# Altium PCB Driver Morpheus PONTE H.PcbDoc
Units mm, origin at the board's own origin, x right, y up, seen from the top; angles counter-clockwise.
Board outline 48.9 x 49 mm, 2 copper layers (Top Layer, Bottom Layer); 55 components, 25 nets, 160 pads, 24 vias.
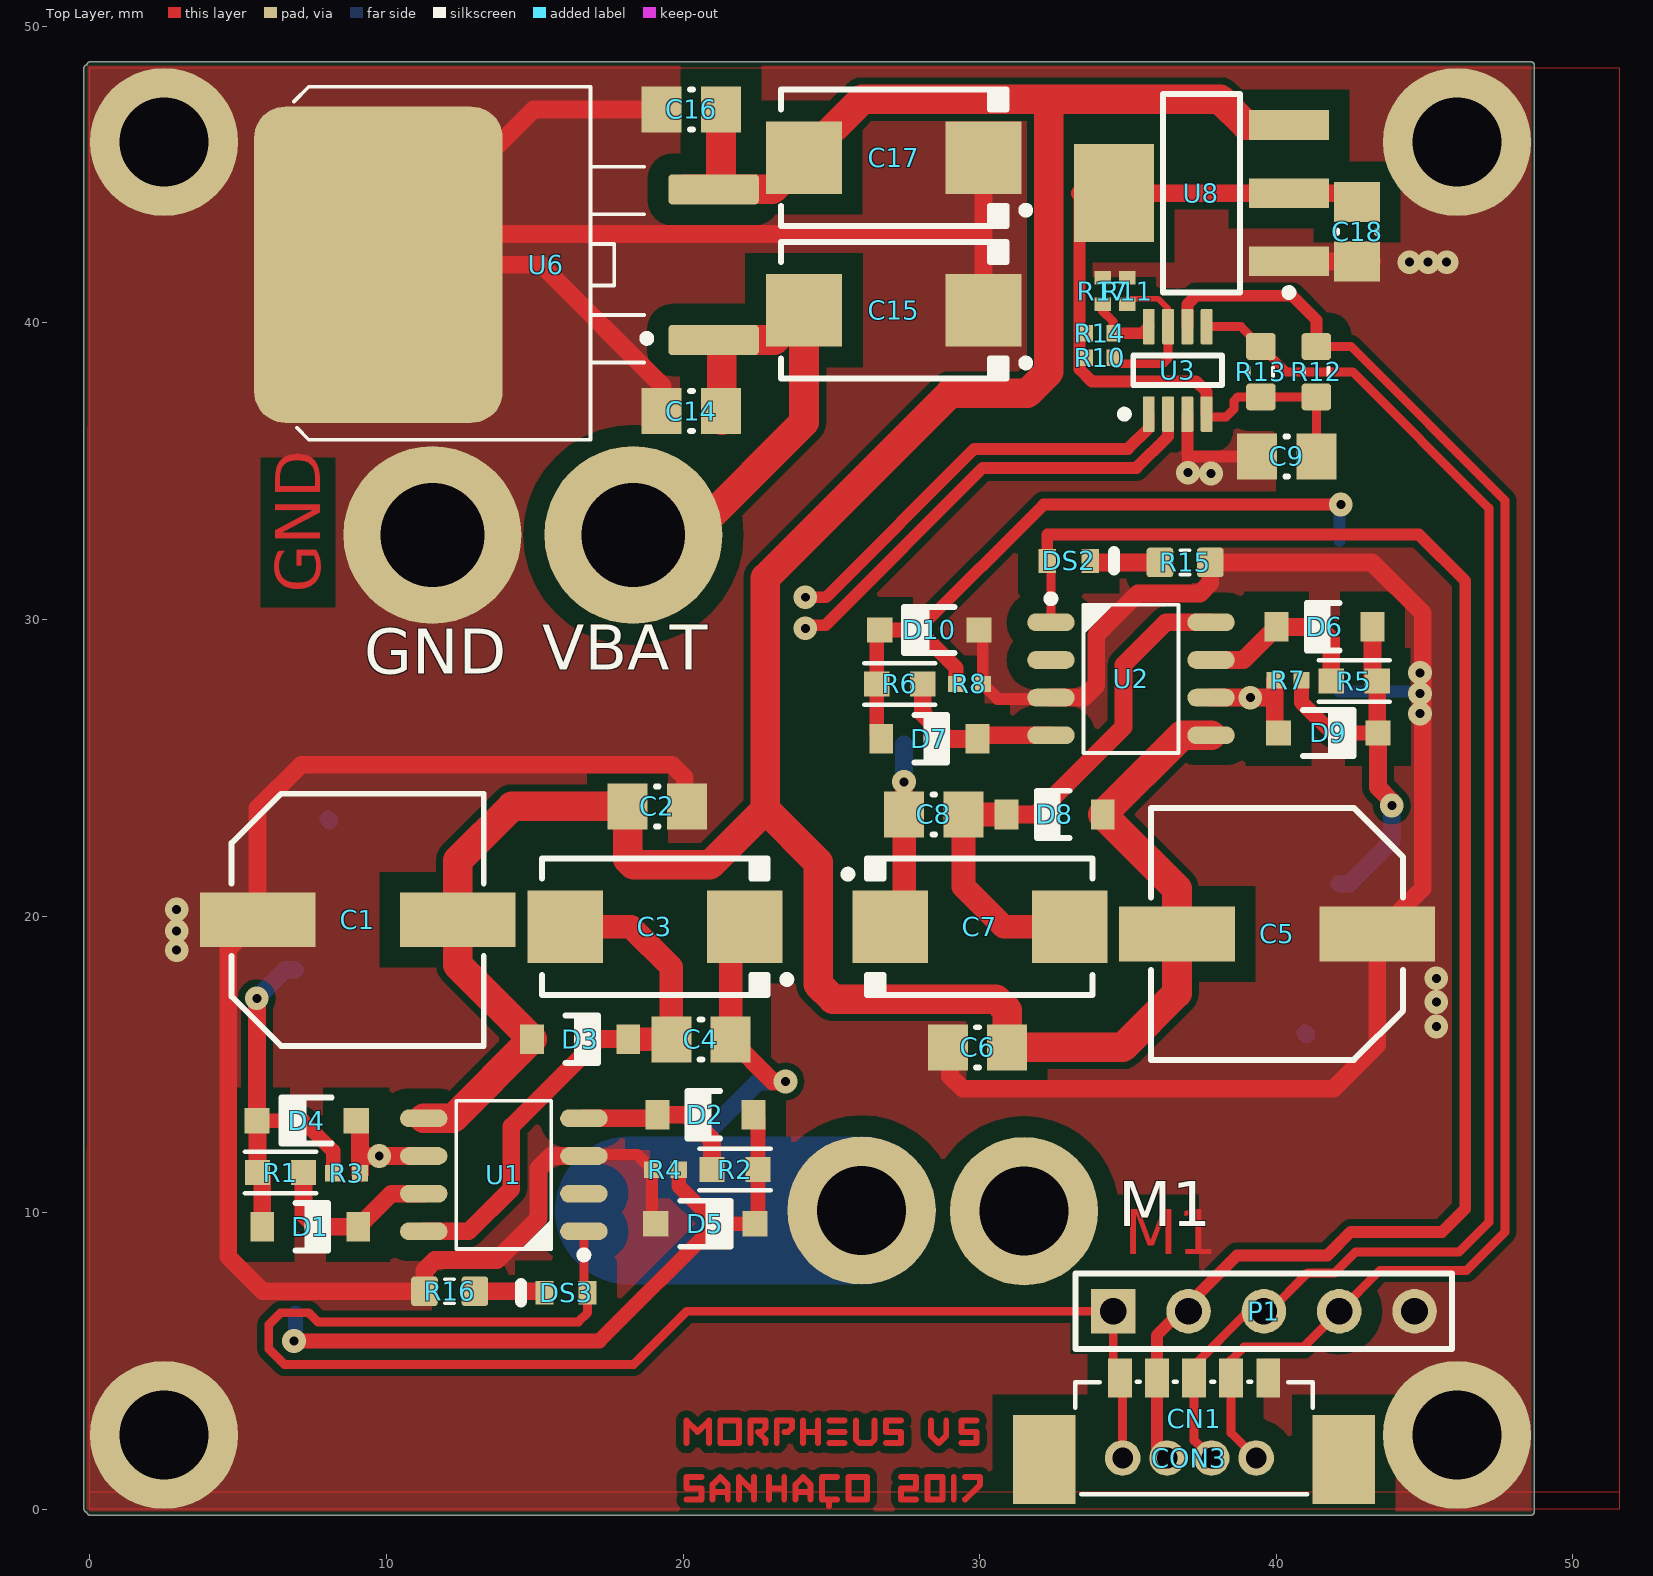
[diagram p0: Top Layer view]
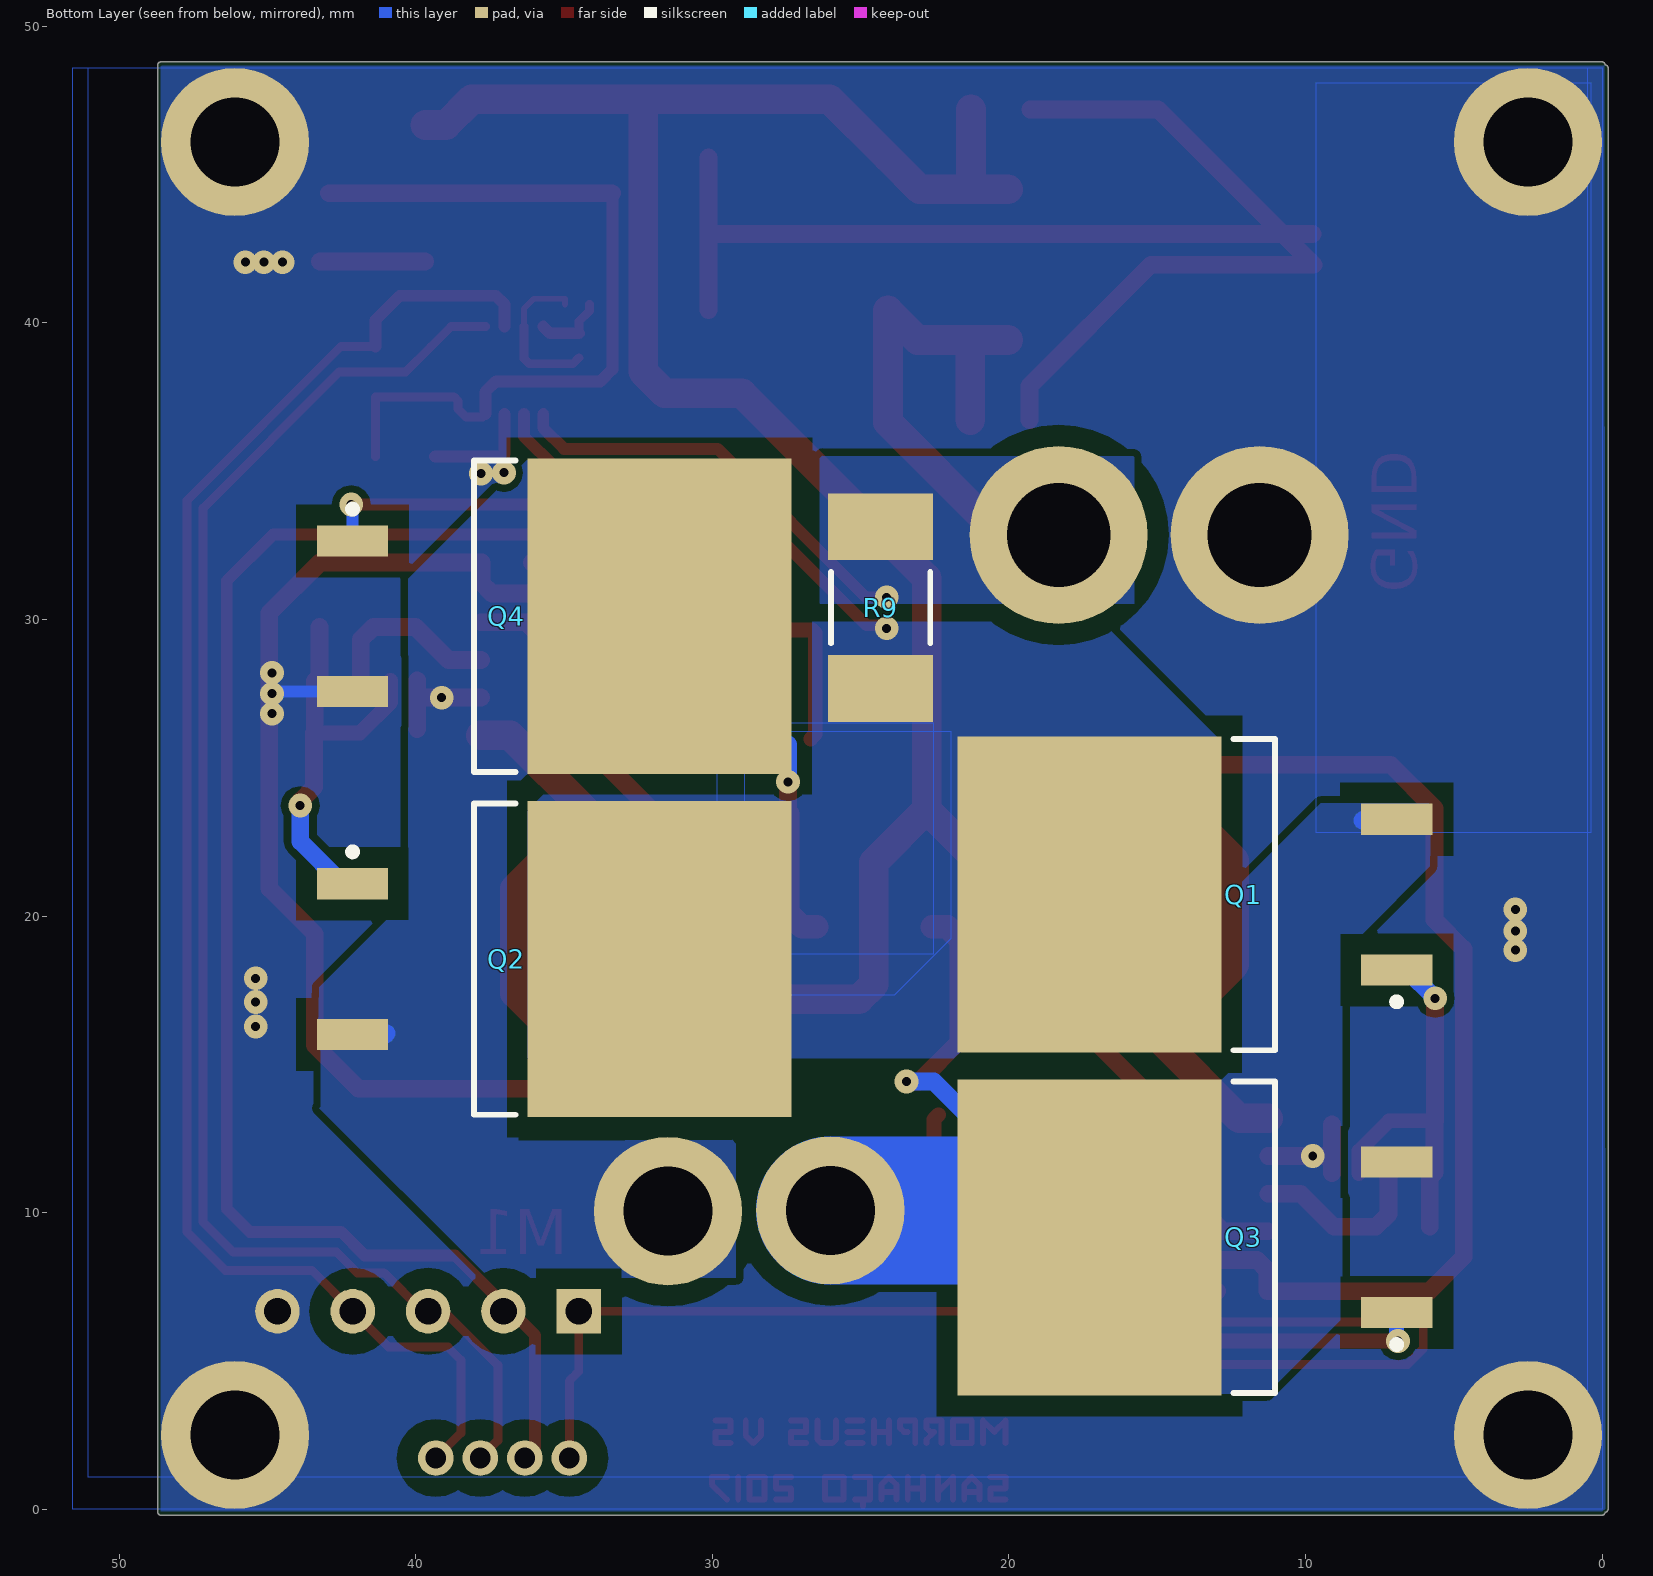
[diagram p1: Bottom Layer view, seen from below]

## Layer stack, top to bottom
Top Solder: solder mask 0.0102, Solder Resist, Dk 3.5
Top Layer: signal copper 0.0356
Dielectric 1: dielectric 0.32, FR-4, Dk 4.8
Bottom Layer: signal copper 0.0356
Bottom Solder: solder mask 0.0102, Solder Resist, Dk 3.5

## Board outline
-0.1,-0.1 cw(c-0.1,0) -0.2,0 -0.2,48.6 cw(c-0.1,48.6) -0.1,48.7 cw(c0,48.7) 0,48.8 48.6,48.8 cw(c48.6,48.7) 48.7,48.7 48.7,-0.1 cw(c48.6,-0.1) 48.6,-0.2 0,-0.2 cw(c0,-0.1)

## Design rules (kind name [scope] priority, off if disabled: settings)
BoardOutlineClearance [All] p1: gap=0 ignorepadtopadclearanceinfootprint=FALSE
Clearance Clearance_1 [IsPad vs InPolygon] p1: gap=0.7 ignorepadtopadclearanceinfootprint=FALSE
Clearance [All] p2: gap=0.24 ignorepadtopadclearanceinfootprint=FALSE except(0: Arc-Hole Track-Hole SMDPad-Hole THPad-Hole Via-Hole Fill-Hole Poly-Hole Region-Hole Text-Hole; 0.7: Track-Region)
ComponentClearance [All vs InComponentClass('IGNORA')] p1: gap=-1 collisioncheckmode=3 verticalgap=-1 showdistances=FALSE
ComponentClearance ComponentClearance_1 [All] p2: gap=0.254 collisioncheckmode=3 verticalgap=0.254 showdistances=FALSE
PlaneConnect [All] p1: planeconnectstyle=Direct reliefexpansion=0.508 reliefentries=4 reliefconductorwidth=0.254 reliefairgap=0.254
PolygonConnect [All] p1: connectstyle=Direct reliefconductorwidth=0.254 reliefentries=4 polygonreliefangle="90 Angle" airgapwidth=0.254
RoutingVias [All] p1: holewidth=0.3 width=0.4 viastyle="Through Hole" minholewidth=0.3 minwidth=0.4 maxholewidth=0.4 maxwidth=0.6
SMDNeckDown [InNet('No Net')] p1: percent=70.000
SolderMaskExpansion [All] p1: expansion=0.102
Width [All] p1: maxlimit=15 minlimit=0.01 preferedwidth=0.4
28 further rules are at their usual default settings.

## Classes and differential pairs
component class "Driver Morpheus SENSOR CORRENTE": C9 R10 R11 R12 R13 R14 R17 U3
component class "Driver Morpheus PONTE H": C1 C2 C3 C4 C5 C6 C7 C8 C14 C15 C16 C17 C18 CN1 CON3 D1 D2 D3 D4 D5 D6 D7 D8 D9 D10 DS2 DS3 P1 Q1 Q2 Q3 Q4 R1 R2 R3 R4 R5 R6 R7 R8 R9 R15 R16 U1 U2 U6 U8

## Components (designator, comment, footprint, x,y, rotation, side; value= is the part's Value field where it differs from the comment)
C1 "100uF 25v" CAPAE9083X70M 9.031,19.875 r0 top
C2 "CAP 100nF 25V 0805(2012)" CAPC0805(2012)145_M#1 19.131,23.7 r180 top value=100nF
C3 "Cap_10u_35v" "CAP POL 2917/7343" 19.051,19.637 r180 top
C4 "CAP 100nF 25V 0805(2012)" CAPC0805(2012)145_M#2 196.247,-58.197 r180 top value=100nF
C5 "100uF 25v" CAPAE9083X70M 40.031,19.4 r180 top
C6 "CAP 100nF 25V 0805(2012)" CAPC0805(2012)145_M#1 29.931,15.575 r0 top value=100nF
C7 "Cap_10u_35v" "CAP POL 2917/7343" 30.011,19.638 r0 top
C8 "CAP 100nF 25V 0805(2012)" CAPC0805(2012)145_M#2 -147.185,97.472 r0 top value=100nF
C9 "CAP 100nF 25V 0805(2012)" CAPC0805(2012)145_M#1 40.356,35.5 r0 top value=100nF
C14 "CAP 100nF 25V 0805(2012)" CAPC0805(2012)145_M#1 20.281,37.025 r0 top value=100nF
C15 "Cap_10u_35v" "CAP POL 2917/7343" 27.106,40.425 r180 top
C16 "CAP 100nF 25V 0805(2012)" CAPC0805(2012)145_M#1 20.281,47.2 r0 top value=100nF
C17 "Cap_10u_35v" "CAP POL 2917/7343" 27.106,45.575 r180 top
C18 "CAP 100nF 25V 0805(2012)" CAPC0805(2012)145_M#1 42.731,43.075 r90 top value=100nF
CN1 "53398-0571" 53398-05 37.231,3.175 r0 top
CON3 "B4B-ZR" B4B-ZR 34.825,1.725 r0 top
D1 "1N4148W" JSCJ-SOD-123-2_V 7.431,9.525 r0 top
D2 "1N4148W" JSCJ-SOD-123-2_V 20.756,13.3 r180 top
D3 "1N4148W" JSCJ-SOD-123-2_V 16.531,15.85 r0 top
D4 "MMSZ5246B-E3-08" VISH-SOD-123-2_V 7.306,13.1 r180 top
D5 "MMSZ5246B-E3-08" VISH-SOD-123-2_V 20.756,9.625 r0 top
D6 "1N4148W" JSCJ-SOD-123-2_V 41.631,29.75 r180 top
D7 "1N4148W" JSCJ-SOD-123-2_V 28.306,25.975 r0 top
D8 "1N4148W" JSCJ-SOD-123-2_V 32.531,23.425 r180 top
D9 "MMSZ5246B-E3-08" VISH-SOD-123-2_V 41.756,26.175 r0 top
D10 "MMSZ5246B-E3-08" VISH-SOD-123-2_V 28.306,29.65 r180 top
DS2 "TLMB1100-GS08" VISH-TLMX1100-2_V 33.006,31.975 r0 top
DS3 "TLMB1100-GS08" VISH-TLMX1100-2_V 16.056,7.3 r180 top
P1 "Header 5" HDR1X5 34.506,6.675 r0 top
Q1 "IRF3205S" D2PAK_N 13.728,20.725 r0 bottom
Q2 "IRF3205S" D2PAK_N 35.334,18.55 r180 bottom
Q3 "IRF3205S" D2PAK_N 13.728,9.167 r0 bottom
Q4 "IRF3205S" D2PAK_N 35.334,30.108 r180 bottom
R1 "22" SMD-0603-RES 6.431,11.35 r270 top
R2 "22" SMD-0603-RES 21.756,11.45 r90 top
R3 "RC0402JR-071KL" RES-0402 8.656,11.325 r180 top value=1K
R4 "RC0402JR-071KL" RES-0402 19.406,11.45 r0 top value=1K
R5 "22" SMD-0603-RES 42.631,27.925 r270 top
R6 "22" SMD-0603-RES 27.306,27.825 r90 top
R7 "RC0402JR-071KL" RES-0402 40.406,27.95 r0 top value=1K
R8 "RC0402JR-071KL" RES-0402 29.656,27.825 r180 top value=1K
R9 "KRL9045-C-R008-F-T1" RESC6332X09M 24.331,30.4 r270 bottom
R10 "10K" 0402-RES-HD 34.05,38.825 r180 top
R11 "10K" 0402-RES-HD 34.975,41.075 r270 top
R12 "Thick Film" RESC1608X55N 41.356,38.354 r90 top value=10K
R13 "Thick Film" RESC1608X55N 39.486,38.354 r90 top value=10K
R14 "10K" 0402-RES-HD 34.05,39.65 r180 top
R15 "Thick Film" RESC1608X55N 36.931,31.925 r0 top value=220R
R16 "Thick Film" RESC1608X55N 12.131,7.35 r180 top value=220R
R17 "10K" 0402-RES-HD 34.15,41.075 r270 top
U1 "IR2184" SOIC127P600X175-8AN 13.956,11.275 r180 top
U2 "IR2184" SOIC127P600X175-8AN 35.106,28 r0 top
U3 "INA219AIDCNR" DCN0008A_M 36.681,38.4 r90 top
U6 "L7812" D2PAK-3 15.381,41.963 r0 top
U8 "LD1117AS33TR" SOT-223_M 37.481,44.375 r180 top

## Footprints (in the part's own frame and the unit in brackets; to place one, negate y for a bottom-side part, rotate by r counter-clockwise, add the part's x,y. Pads: shape width x height; smd on the part's side, far side on the other; paste and mask are expansions set on the pad)
0402-RES-HD [mm] "Chip Resistor, Body 1.0x0.5mm, IPC High Density"
  rect 0.45x0.55 smd: 1(-0.45,0) 2(0.45,0)
  body extent -0.52,-0.27 0.53,0.28, height 0.4
53398-05 [mm]
  rect 0.8x1.3 smd: 1(-2.5,1.25) 2(-1.25,1.25) 3(0,1.25) 4(1.25,1.25) 5(2.5,1.25)
  rect 2.1x3 smd: PAD1(-5.05,-1.5) PAD2(5.05,-1.5)
  silkscreen extent -4,-2.67 4,1.12, body extent -5.7,-2.61 5.7,1.59, height 4.7
B4B-ZR [mm]
  round 1.2 hole 0.7: 1(0,0) 2(1.5,0) 3(3,0) 4(4.5,0)
  body extent -1.5,-1.3 6,2.2, height 4.5
"CAP POL 2917/7343" [mm] "Molded Capacitor, 2-Leads, Body 7.30x4.30mm, IPC Medium Density"
  rect 2.55x2.45 smd: 1(-3.025,0) 2(3.025,0)
  silkscreen extent -4.58,-2.3 3.8,2.3, body extent -3.65,-2.15 3.65,2.15, height 4.1
CAPAE9083X70M [mm] "Aluminum Electrolytic Capacitor, Body 8,30x8,30x7,00mm, IPC Low Density"
  rect 3.9x1.85 smd: 1(-3.375,0) 2(3.375,0)
  silkscreen extent -4.25,-4.25 4.25,4.25, body extent -4.25,-4.25 4.25,4.25, height 7
CAPC0805(2012)145_M#1 [mm] "Chip Capacitor, Body 2.0x1.2mm, Height 1.45mm, IPC Low Density"
  rect 1.35x1.55 smd: 1(-1,0) 2(1,0)
  silkscreen extent -0.05,-0.67 0.05,0.67, body extent -1.1,-0.72 1.1,0.72, height 1.45
CAPC0805(2012)145_M#2 [mm] "Chip Capacitor, Body 2.0x1.2mm, Height 1.45mm, IPC Low Density"
  rect 1.35x1.55 smd: 1(174.641,-74.041) 2(176.641,-74.041)
  silkscreen extent 175.59,-74.72 175.69,-73.37, body extent 174.54,-74.77 176.74,-73.32, height 1.45
D2PAK-3 [mil] "D-PAK/TO-263-3; 3 Leads (1 Cropped); Body 14.7 (inc. leads) x 10.2 mm (LxW max)"
  round 20 on Mech15: 0(0,0)
  rrect25% 120x40 smd: 1(222.5,-100) 3(222.5,100)
  rrect25% 330x420 smd: 2(-222.5,0)
  silkscreen extent -335,-232 139,236, body extent -361,-197 256,197, height 189
D2PAK_N [mm] "D-PAK/TO-263-3; 3 Leads (1 Cropped); Body 14.7 (inc. leads) x 10.2 mm (LxW max)"
  rect 2.4x1.05 smd: 1(-6.8,2.54) 3(-6.8,-2.54)
  rect 8.9x10.65 smd: 2(3.55,0)
  silkscreen extent -6.92,-5.25 -1.3,5.25, body extent -2.7,-5.28 6.3,5.28, height 4.69
DCN0008A_M [mm] "SOT23, 8-Leads, Body 3x1.75mm, Pitch 0.65mm, IPC Low Density"
  rrect22% 1.2x0.4 smd: 1(-1.475,0.975) 2(-1.475,0.325) 3(-1.475,-0.325) 4(-1.475,-0.975) 5(1.475,-0.975) 6(1.475,-0.325) 7(1.475,0.325) 8(1.475,0.975)
  silkscreen extent -1.6,-1.5 0.5,1.92, body extent -0.88,-1.5 0.87,1.5, height 1.45
HDR1X5 [mm] "Connector; Header; 5 Position"
  rect 1.5x1.5 hole 0.9: 1(0,0)
  round 1.5 hole 0.9: 2(2.54,0) 3(5.08,0) 4(7.62,0) 5(10.16,0)
  silkscreen extent -1.27,-1.27 11.43,1.27
JSCJ-SOD-123-2_V [mm] "SMD, 2-Leads, Body 2.7x1.6mm, Height 1.25mm"
  rect 0.8x1 smd: 1(-1.62,0) 2(1.62,0)
  silkscreen extent -0.5,-0.8 0.6,0.8, body extent -1.35,-0.8 1.35,0.8, height 1.25
RES-0402 [mm]
  rect 0.55x0.55 smd: 1(-0.45,0) 2(0.45,0)
  body extent -0.53,-0.27 0.53,0.28, height 0.4
RESC1608X55N [mm] "Chip Resistor, Body 1.6x0.8mm, EIA 0603, IPC Medium Density"
  round 0.254 on Mech15: 0(0,0)
  rrect25% 0.9x1 smd: 1(-0.85,0) 2(0.85,0)
  Top Layer pour cut-out: -0.6,0.5 -0.4,0.7 0.4,0.7 0.6,0.5 0.6,-0.5 0.4,-0.7 -0.4,-0.7 -0.6,-0.5
  silkscreen extent -0.15,-0.41 0.15,0.41, body extent -0.87,-0.47 0.88,0.48, height 0.54
RESC6332X09M [mm] "Chip Resistor, 2-Leads, Body 6,35x3,18mm, IPC Low Density"
  rect 2.25x3.55 smd: 1(-2.725,0) 2(2.725,0)
  silkscreen extent -1.2,-1.68 1.2,1.68, body extent -3.3,-1.72 3.3,1.72, height 0.87
SMD-0603-RES [mm]
  rect 0.85x0.85 smd: 1(0,0.775) 2(0,-0.775)
  silkscreen extent -0.7,-1.2 0.7,1.2, body extent -0.4,-0.85 0.4,0.85, height 0.56
SOIC127P600X175-8AN [mm] "SOIC, 8-Leads, Body 4.9x3.9mm, Pitch 1.27mm, IPC Medium Density"
  round 1 on Mech15: 0(0,0)
  oval 1.6x0.6 smd: 1(-2.7,1.905) 2(-2.7,0.635) 3(-2.7,-0.635) 4(-2.7,-1.905) 5(2.7,-1.905) 6(2.7,-0.635) 7(2.7,0.635) 8(2.7,1.905)
  silkscreen extent -2.83,-2.5 1.6,2.82, body extent -3,-2.45 3,2.45, height 1.75
SOT-223_M [mm] "SOT223, 4-Leads, Body 6.5x3.5mm, Pitch 2.3mm, Lead Span 7mm, IPC Low Density"
  rect 2.7x1 smd: 1(-2.95,2.3) 2(-2.95,0) 3(-2.95,-2.3)
  rect 2.7x3.3 smd: 4(2.95,0)
  silkscreen extent -3.08,-3.35 1.3,3.47, body extent -1.85,-3.35 1.85,3.35, height 1.8
VISH-SOD-123-2_V [mm] "SMD, 2-Leads, Body 2.7x1.55mm, Height 1.35mm"
  rect 0.85x0.85 smd: 1(-1.675,0) 2(1.675,0)
  silkscreen extent -0.85,-0.78 0.85,0.78, body extent -1.35,-0.77 1.35,0.77, height 1.35
VISH-TLMX1100-2_V [mm] "SMD, 2-Leads, Body 1.6x0.8mm"
  rect 0.6x0.8 smd: 1(-0.725,0) 2(0.725,0)
  silkscreen extent 1.53,-0.3 1.53,0.3, body extent -0.8,-0.4 0.8,0.4, height 0.65

## Part data
C1: library part Cap_10u_35v
C2 C4 C6 C8 C9 C14 C16 C18: library part CMP-1036-04408-1, "CAP 100nF 25V ±5% 0805 (2012 Metric) Thickness 1.45mm SMD", Case-EIA=0805, Case-Metric=2012, Rated Voltage="25 V", Tolerance=±5%, Max Thickness="1.45 mm", Technology=SMT
C5: library part Cap_100u_25v, "Cap Tântalo"
CN1: library part 53398-0571-5, "CONN HEADER 5POS 1.25MM VERT SM", Cod EMS=05.285.005.201, Part No=53398-0571
D1 D2 D3 D6 D7 D8: library part CMP-0914-00001-1, "Fast Switching Diode, 75 V, 150 mA, 2-Pin 2.7 x 1.6 x 1.25 mm SMD, Tape and Reel", Manufacturer="Changjiang Electronics", ComponentLink1Description="Manufacturer URL", ComponentLink1URL=http://www.cj-elec.com/, ComponentLink2Description=Datasheet, ComponentLink2URL=http://www.cj-elec.com/txUpfile/20121613352740313.pdf, ComponentLink3Description="Package Specification", ComponentLink3URL=http://www.cj-elec.com/txUpfile/201412112231195145.pdf, DatasheetVersion="Rev. A", IO (mA)=150, IR (uA)=1, Mounting Technology="Surface Mount", PackageDescription="2-Pin SMD, Body 2.7 x 1.6 mm, Height 1.25 mm", PackageReference=SOD-123-2, PackageVersion="Rev. A", Packing="Tape and Reel", PartNumber=1N4148W, PD (mW)=350, Trr (ns)=4, TSTG (degC)="-55 to 150", VF (V)=1.25, VR (V)=75
D4 D5 D9 D10: library part CMP-0931-00032-1, "Small Signal Zener Diode, 16 V +/- 5%, -55 to 155 degC, 2-Pin SOD-123, RoHS, Tape and Reel", Manufacturer="Vishay Semiconductor", Operating Temperature="-55 to 150 degC", Power Dissipation (mW)=500, Test Current (IZT1) (mA)=7.8, Tolerance="+/- 5%", Zener Voltage (NOM.) (V)=16, ComponentLink1Description="Manufacturer URL", ComponentLink1URL=http://www.vishay.com/, ComponentLink2Description=Datasheet, ComponentLink2URL=http://www.vishay.com/docs/85774/mmsz5225.pdf, ComponentLink3Description="Package Specification", ComponentLink3URL=http://www.vishay.com/docs/85774/mmsz5225.pdf, DatasheetVersion="Rev. 1.9", Int. Construction=Single, Mounting Technology="Surface Mount", PackageDescription="2-Pin SMD, Body 2.7 x 1.55 mm, Height 1.35 mm", PackageReference=SOD-123-2, PackageVersion="Rev. 1.9", Packing="Tape and Reel", PartNumber=MMSZ5246B-E3-08, RoHS=TRUE, Zener Impedance (IZT1) (Max.) (Ohm)=17
DS2 DS3: library part CMP-1666-00028-1, "Blue LED, 10 mA, 3.9 V, -40 to 100 degC, 2-Pin SMD (0603), RoHS, Tape and Reel", Capacitance="10 nF", Case\Package=Radial, Max Operating Temperature="125 degC", Min Operating Temperature="-55 degC", Package Quantity=500, Tolerance=10%, Type (Capacitors)=X7R, Voltage Rating="100 V", ComponentLink1Description="Manufacturer URL", ComponentLink1URL=http://www.vishay.com/, ComponentLink2Description=Datasheet, ComponentLink2URL=http://download.siliconexpert.com/pdfs/2016/8/7/12/43/26/667/vsh_/manual/379263299541529tlmb1100.pdf, DatasheetVersion="Rev. 2.7, 03/2016", Height="2.54 mm", Lead Pitch="2.54 mm", Length="5.33 mm", Mount="Through Hole", PackageDescription="2-Pin Surface Mount Device, Body 1.6 x 0.8 mm", PackageReference=0603, Packaging=Bulk, Pins=2, Radiation Hardening=No, REACH SVHC="No SVHC", RoHSCompliant=true, Width="3.81 mm"
P1: "Header, 5-Pin", LatestRevisionDate=17-Jul-2002, LatestRevisionNote="Re-released for DXP Platform.", Publisher="Altium Limited"
Q1 Q2 Q3 Q4: "HEXFET Power MOSFET", ComponentLink1Description="Manufacturer Link", ComponentLink1URL=http://www.irf.com/, ComponentLink2Description=Datasheet, ComponentLink2URL=http://www.irf.com/product-info/datasheets/data/irf3205s.pdf, DatasheetVersion=Aug-1997, LatestRevisionDate=20-Nov-2009, LatestRevisionNote="IPC-7351 Footprint Added.", PackageDescription="3-Pin Transistor Outline Package 2.54 mm Pitch, 15.1 mm Lead Span", PackageReference=D2PAK, Published=8-Jun-2000, Publisher="Altium Limited"
R1 R2 R5 R6: library part ERJ-3EKF22R0V, "RES SMD 22 OHM 1% 1/10W 0603", Digi-Key Part Number=P22.0HCT-ND, Manufacturer="Panasonic Electronic Components", Operating Temperature="-55°C ~ 155°C", Package / Case="0603 (1608 Metric)", Power (Watts)="0.1W, 1/10W", Supplier Device Package=0603, Temperature Coefficient=±100ppm/°C, Tolerance=±1%, @ qty=1500, Composition="Thick Film", Datasheets=http://industrial.panasonic.com/www-cgi/jvcr13pz.cgi?E+PZ+3+AOA0002+ERJ3EKF22R0V+7+WW, Factory Stock=0, Failure Rate=-, Features="Automotive AEC-Q200", Height - Seated (Max)="0.022\" (0.55mm)", Image=//media.digikey.com/Photos/Panasonic%20Photos/MFG_ERJ-P6W%20Series.jpg, Minimum Quantity=1, Number of Terminations=2, Packaging="Cut Tape (CT)", Part Number=ERJ-3EKF22R0V, Part Status=Active, Quantity Available=100321, Series=ERJ, Size / Dimension="0.063\" L x 0.031\" W (1.60mm x 0.80mm)", Unit Price (USD)=0.00379
R3 R4 R7 R8: library part "RES 1K 0402", "RES SMD 1K OHM 5% 1/16W 0402"
R9: library part CMP-1666-00018-2, "Chip Resistor, 0.008 Ohm, +/- 1%, 4 W", Case/Package=1206, Case Code (Metric)=3216, Max Operating Temperature="170 degC", Min Operating Temperature="-65 degC", PartNumber=WSLP12061L000FEA, Resistance="0.001 Ohm", Tolerance=1%, Case Code (Imperial)=1206, ComponentLink1Description="Manufacturer URL", ComponentLink1URL=http://www.vishay.com/, ComponentLink2Description=Datasheet, ComponentLink2URL=http://www.farnell.com/datasheets/2049155.pdf, DatasheetVersion=04/2015, Height="0.635 mm", Length="3.2 mm", Mounting Technology="Surface Mount", PackageDescription="2-Pin Surface Mount Device, Body 3.2 x 1.6 mm", Packaging="Tape and Reel", REACH SVHC=Unknown, RoHSCompliant=True, Width="1.6 mm"
R10 R11 R14 R17: library part R0402-10K-11, "RES 10K OHM 1/10W 1% 0402 SMD", Part No=ERJ-2RKF1002X, Cod EMS=05.280.029.525, Family=ERJ-2RKF....X, Family Description="RESISTOR FILME ESPESSO 10R-1M / 1/10W / 1% / 0402. P/N: ERJ-2RKF....X – PANASONIC ELECTRONIC COMPONENTS."
R12 R13: library part RES_10K_0603_1%, "Resistor SMD chip 10k Ohm 0.1W 1% 0603", Manufacturer 1=Yageo, Manufacturer Part Number 1=RC0603FR-0710KL, Package / Case="0603 (1608 Metric)", Ratings=1/10W, Supplier Part Number 1=311-10.0KHRCT-ND, Tolerance=±1%, SCDType=spec, Supplier 1=Digi-Key
R15 R16: library part RES_220R_0603_5%, "Resistor SMD chip 220 Ohm 0.1W 5% 0603", Manufacturer 1=Yageo, Manufacturer 2="Panasonic Electronic Components", Manufacturer 3="Stackpole Electronics Inc", Manufacturer 4="Rohm Semiconductor", Manufacturer 5="Royal Ohm", Manufacturer Part Number 1=RC0603JR-07220RL, Manufacturer Part Number 2=ERJ-3GEYJ221V, Manufacturer Part Number 3=RMCF0603JT220R, Manufacturer Part Number 4=MCR03ERTJ221, Manufacturer Part Number 5=0603WAJ0221, Package / Case="0603 (1608 metric)", Ratings="1/10 W", Supplier Part Number 1=311-220GRCT-ND, Tolerance=±5%, ComponentLink1Description=http://www.yageo.com/documents/recent/PYu-RC0603_51_RoHS_L_4.pdf, ComponentLink1URL=http://www.yageo.com/documents/recent/PYu-RC0603_51_RoHS_L_4.pdf, ComponentLink2Description=http://industrial.panasonic.com/www-cgi/jvcr13pz.cgi?E+PZ+3+AOA0001+ERJ3GEYJ221V+7+WW, ComponentLink2URL=http://industrial.panasonic.com/www-cgi/jvcr13pz.cgi?E+PZ+3+AOA0001+ERJ3GEYJ221V+7+WW, ComponentLink3Description=http://www.seielect.com/Catalog/SEI-RMCF_RMCP.pdf, ComponentLink3URL=http://www.seielect.com/Catalog/SEI-RMCF_RMCP.pdf, ComponentLink4Description=http://rohmfs.rohm.com/en/products/databook/datasheet/passive/resistor/chip_resistor/mcr_g.pdf, ComponentLink4URL=http://rohmfs.rohm.com/en/products/databook/datasheet/passive/resistor/chip_resistor/mcr_g.pdf, Material="Thick Film", RoHS 1="RoHS Compliant", RoHS 2="RoHS Compliant", RoHS 3="RoHS Compliant", RoHS 4="RoHS Compliant", SCDType=spec, Supplier 1=Digi-Key, Supplier 2=Digi-Key, Supplier 3=Digi-Key, Supplier 4=Digi-Key, Supplier Part Number 2=P220GCT-ND, Supplier Part Number 3=RMCF0603JT220RCT-ND, Supplier Part Number 4=RHM220CGCT-ND
U1 U2: PSpiceTemplate="X^@REFDES %VCC %IN %SD %COM %VB %HO %VS %LO @MODEL PARAMS:  ?CDELAY|CDELAY=@CDELAY||CDELAY=50N| ?RDELAY|RDELAY=@RDELAY||RDELAY=50| ?T1|T1=@T1||T1=-40| ?T2|T2=@T2||T2=25| ?T3|T3=@T3||T3=125| ?V1|V1=@V1||V1=10| ?V2|V2=@V2||V2=15| ?V3|V3=@V3||V3=20| ?TOFFT1|TOFFT1=@TOFFT1||TOFFT1=270N| ?TOFFT2|TOFFT2=@TOFFT2||TOFFT2=270N| ?TOFFT3|TOFFT3=@TOFFT3||TOFFT3=270N| ?TOFFV1|TOFFV1=@TOFFV1||TOFFV1=270N| ?TOFFV2|TOFFV2=@TOFFV2||TOFFV2=270N| ?TOFFV3|TOFFV3=@TOFFV3||TOFFV3=270N| ?TONT1|TONT1=@TONT1||TONT1=210N| ?TONT2|TONT2=@TONT2||TONT2=210N| ?TONT3|TONT3=@TONT3||TONT3=210N| ?TONV1|TONV1=@TONV1||TONV1=210N| ?TONV2|TONV2=@TONV2||TONV2=210N| ?TONV3|TONV3=@TONV3||TONV3=210N|", CDELAY=50N, RDELAY=50, T1=-40, T2=25, T3=125, TOFFT1=270N, TOFFT2=270N, TOFFT3=270N, TOFFV1=270N, TOFFV2=270N, TOFFV3=270N, TONT1=210N, TONT2=210N, TONT3=210N, TONV1=210N, TONV2=210N, TONV3=210N, V1=10, V2=15, V3=20
U3: library part CMP-0704-00041-2, "Zero-Drift, Bi-directional Current / Power Monitor, 3 to 5.5 V, -40 to 125 degC, 8-pin SOP (DCN8), Green (RoHS & no Sb/Br)", Manufacturer="Texas Instruments", Quiescent Current (+/-)(Typ)(mA)=0.7, Rating=Catalog, CMRR(Min)(dB)=100, Code_JEDEC=MO-178, Common Mode Range(Max)(V)=26, Common Mode Range(Min)(V)=0, ComponentLink1Description="Manufacturer URL", ComponentLink1URL=http://www.ti.com/, ComponentLink2Description=Datasheet, ComponentLink2URL=http://www.ti.com/general/docs/lit/getliterature.tsp?genericPartNumber=INA219&fileType=pdf, ComponentLink3Description="Package Specification", ComponentLink3URL=http://www.ti.com/lit/ml/mpds099c/mpds099c.pdf, DatasheetVersion=SBOS448F, Eco-Plan="Green (RoHS & no Sb/Br)", Gain(V/V)="1, 0.5, 0.25, 0.125", Input Offset (+/-)(Max)(uV)=100, Mounting Technology="Surface Mount", PackageDescription="8-Pin Plastic Small Outline, Body 1.6 x 2.9 mm, Pitch 0.65 mm", PackageReference=DCN0008A, PackageVersion="4202106/D, 11/2009", PartNumber=INA219AIDCNR, Small-Signal Bandwidth(Typ)(MHz)=0.011, SubFamily="Current Shunt Monitor", Vs(Max)(V)=5.5, Vs(Min)(V)=3
U6: library part LM7812
U8: library part CMP-0244-00316-1, "1A, Low Drop Positive Voltage Regulator, 3.3V, 4-Pin SOT-223, Tape and Reel", ComponentLink1Description="Manufacturer URL", ComponentLink1URL=http://www.st.com, ComponentLink2Description=Datasheet, ComponentLink2URL=http://www.st.com/internet/com/TECHNICAL_RESOURCES/TECHNICAL_LITERATURE/DATASHEET/CD00002116.pdf, DatasheetVersion=2/12/2011, PackageDescription="4-Pin SOT-223 Package, 6.5 x 3.5 mm Body, 2.3 mm Pitch, 7 mm Lead Span", PackageReference=SOT-223, PackageVersion=2010

## Free pads (board coordinates)
  round 6 hole 3.5: 7(18.325,32.85) 8(11.55,32.85)
  round 5 hole 3: 8(2.5,2.5) 8(2.5,46.1) 8(26.025,10.075) 8(31.5,10.05) 8(46.1,2.5) 8(46.1,46.1)

## Via types
v1: diameter 0.8, hole 0.3, Top Layer to Bottom Layer, 24 vias

## Nets (pads, with @x,y where several pads share a name; then routed paths per layer and width w, separated by ;. In a path a pad name is that pad's centre, name@x,y a point inside that pad or via, vN(x,y) a via of type N, cw(c..) or ccw(c..) an arc to the next point about the centre after c; other vN are vias at no path point)
+3.3v: C9.2 C18.2 R10.2 R12.1 R13.1 R14.2 U3.4 U8.2 U8.4 | length 27
  Top Layer w0.3: U3.4 37.756,36.825 38.306,36.825 38.581,37.1 38.581,37.375 38.71,37.504 R12.1 C9.2
  Top Layer w0.4: U8.4@33.375,44.375 33.375,38.431 33.781,38.025 37.302,38.025 37.656,37.671 U3.4
  Top Layer w0.6: U8.4@33.375,44.375 C18.2@42.931,44.375
+12V: C1.2 C2.2 C5.2 C6.2 C16.2 C17.2 D3.1 D8.1 U1.5 U2.5 U6.3 U8.3 | length 111.7
  Top Layer w1: U1.5 12.241,13.18 D3.1 12.406,18.355 C1.2 12.406,21.875 14.231,23.7 C2.2 18.131,21.925 18.331,21.725 20.906,21.725 22.775,23.594 24.556,21.813 24.556,17.7 25.056,17.2 30.556,17.2 30.931,16.825 C6.2 34.831,15.575 36.656,17.4 C5.2 36.656,20.92 D8.1 36.821,26.095 U2.5 ; U6.3@20.033,44.503 U6.3 23.009,44.503 C17.2 26.046,47.54 38.116,47.54 38.981,46.675 U8.3@39.681,46.675 ; U6.3@21.281,44.752 C16.2 ; 22.775,23.494 22.775,31.4 29,37.625 31.606,37.625 32.331,38.35 32.331,47.54
A0: R10.1 R11.2 U3.7 | length 5.4
  Top Layer w0.2: R11.2 34.975,40.815 36.021,40.815 36.356,40.48 U3.7
  Top Layer w0.3: R10.1 34.7,38.625 36.175,38.625 36.356,38.806 U3.7
A1: R14.1 R17.2 U3.8 | length 2.4
  Top Layer w0.3: R17.2 34.15,40.398 34.5,40.048 R14.1
  Top Layer w0.4: R14.1 35.481,39.65 U3.8
"BAT 5S": C14.2 C15.2 pad.7 R9.1 U3.1 U6.1 | length 32.8
  Top Layer w0.4: v1(24.126,30.752) 24.827,30.752 29.825,35.75 35.001,35.75 35.706,36.455 U3.1
  Top Layer w1: pad.7@18.848,33.027 18.325,32.9 20.555,33.125 24.081,36.651 C15.2 23.079,39.423 U6.1 U6.1@20.033,39.423 ; C14.2@21.306,36.725 U6.1@21.306,39.15
GND: C1.1 C2.1 C5.1 C6.1 C9.1 C14.1 C15.1 C16.1 C17.1 C18.1 CN1.5 D5.1 D10.1 P1.5 pad.8@2.5,2.5 pad.8@2.5,46.1 pad.8@11.55,32.85 pad.8@46.1,2.5 pad.8@46.1,46.1 Q3.3 Q4.3 R4.1 R8.1 R11.1 R15.2 R16.2 R17.1 U1.3 U2.3 U3.3 U6.2 U8.1 | length 164.5
  Top Layer w0.4: U1.3 16.696,11.95 18.456,11.95 R4.1 18.956,9.75 D5.1 ; D10.1 30.106,29.525 R8.1 30.606,27.325 32.366,27.325 U2.3 ; U3.3 37.006,35.575 ; v1(37.025,34.95) 37.025,35.556 37.006,35.575 ; C9.1 37.081,35.5 37.006,35.575
  Top Layer w0.6: U6.2@9.766,43 30.131,43 ; U1.3 15.541,11.91 15.131,11.5 15.131,9.8 13.731,8.4 11.631,8.4 11.281,8.05 R16.2 5.831,7.35 4.666,8.515 4.666,18.885 C1.1 5.656,23.625 7.131,25.1 19.631,25.1 20.056,24.675 20.056,23.775 C2.1 ; C16.1 14.966,47.2 U6.2 15.218,41.963 19.306,37.875 C14.1@19.306,36.725 ; C6.1 29.006,15.5 29.006,14.6 29.431,14.175 41.931,14.175 43.406,15.65 C5.1 44.94,20.934 44.94,30.216 43.231,31.925 R15.2 37.781,31.225 37.431,30.875 35.331,30.875 33.931,29.475 33.931,27.775 33.521,27.365 U2.3 ; C15.1 30.131,43 ; C17.1 30.131,43 ; U8.1@39.681,42.075 C18.1@43.231,42.075
  Bottom Layer w0.4: Q4.3 44.782,27.568 v1(44.85,27.5)
  other v1: 45.4,16.275 45.4,17.1 45.4,17.9 2.925,18.85 2.925,19.5 2.925,20.225 44.85,26.825 44.85,28.2 37.8,34.925 44.5,42.05 45.125,42.05 45.75,42.05
IN_1: CN1.1 CON3.1 DS3.1 P1.1 U1.1 | length 48.9
  Top Layer w0.3: DS3.1@16.656,7.425 U1.1 ; DS3.1 16.781,6.625 16.471,6.315 7.691,6.315 7.381,6.625 6.431,6.625 6.031,6.225 6.031,5.408 6.554,4.885 18.335,4.885 20.125,6.675 P1.1@34.256,6.675 ; P1.1 34.506,4.65 CN1.1 34.825,4.331 CON3.1
IN_2: CN1.2 CON3.2 DS2.1 P1.2 U2.1 | length 55.2
  Top Layer w0.3: U2.1 DS2.1@32.406,31.85
  Top Layer w0.4: DS2.1 32.281,32.865 44.816,32.865 46.375,31.306 46.375,10.125 45.6,9.35 42.521,9.35 41.731,8.56 38.681,8.56 35.981,5.86 CN1.2 35.981,2.069 CON3.2
NetC3_1: C3.1 C4.1 D4.1 pad.8@26.025,10.075 Q1.3 Q3.2 R3.1 U1.6 | length 25.7
  Top Layer w0.6: R3.1 D4.1@9.106,12.975 ; 9.121,11.91 U1.6 11.246,11.9 U1.6@11.236,11.91 ; C4.1 23.025,14.425 v1(23.456,14.425)
  Top Layer w0.8: C4.1 21.606,19.167 C3.1 C3.1@22.583,19.637
  Bottom Layer w0.6: Q1.3@8.041,23.265 Q1.3@8.081,23.225 ; Q3.2@18.186,10.075 22.536,14.425 v1(23.456,14.425)
  Bottom Layer w5: Q3.2@18.186,10.075 pad.8@26.025,10.075
  other v1: 9.756,11.91
NetC3_2: C3.2 C4.2 D3.2 U1.8 | length 18.8
  Top Layer w0.6: U1.8 12.776,9.37 14.206,10.8 14.206,12.9 17.156,15.85 D3.2
  Top Layer w0.8: C3.2 18.244,19.637 19.606,18.275 C4.2 ; D3.2 C4.2@19.6,15.85
NetC7_1: C7.1 C8.1 D9.1 pad.8@31.5,10.05 Q2.3 Q4.2 R7.1 U2.6 | length 12
  Top Layer w0.6: v1(27.451,24.526) 27.451,23.436 C8.1 ; v1(39.131,27.365) U2.6 39.941,27.365 ; D9.1@39.956,26.3 R7.1
  Top Layer w0.8: C7.1@26.479,19.638 C7.1 27.456,20.108 C8.1
  Bottom Layer w0.6: v1(27.451,24.526) 27.451,25.775 Q4.2@27.456,25.78 ; Q2.3@40.981,16.05 Q2.3@41.021,16.01
NetC7_2: C7.2 C8.2 D8.2 U2.8 | length 18.8
  Top Layer w0.6: D8.2 31.906,23.425 34.856,26.375 34.856,28.475 36.286,29.905 U2.8
  Top Layer w0.8: C8.2 29.456,21 30.818,19.638 C7.2 ; C8.2@29.462,23.425 D8.2
NetCN1_3: CN1.3 CON3.3 P1.3 R13.2 U3.5 | length 51.5
  Top Layer w0.3: U3.5 38.815,39.875 R13.2 40.34,38.35 42.581,38.35 47.175,33.756 47.175,9.675 46.175,8.675 42.68,8.675 41.975,7.97 41.07,7.97 39.775,6.675 P1.3 39.05,6.675 37.231,4.856 CN1.3 37.231,2.319 CON3.3
NetCN1_4: CN1.4 CON3.4 P1.4 R12.2 U3.6 | length 54.3
  Top Layer w0.3: CON3.4 38.481,2.569 CN1.4 38.481,5.031 38.915,5.465 40.916,5.465 P1.4 43.501,8.05 46.425,8.05 47.715,9.34 47.715,34.016 42.527,39.204 R12.2
  Top Layer w0.4: U3.6 37.006,40.621 37.3,40.915 40.541,40.915 41.356,40.1 R12.2
NetD1_1: D1.1 D4.2 Q1.1 R1.2 R3.2 | length 13.2
  Top Layer w0.5: D4.2 7.181,13.1 8.206,12.075 R3.2
  Top Layer w0.6: D4.2 v1(5.631,17.225) ; D4.2@5.656,13.075 R1.2 5.811,11.195 D1.1
  Bottom Layer w0.6: v1(5.631,17.225) 6.591,18.185 Q1.1
NetD1_2: D1.2 R1.1 U1.7 | length 6.1
  Top Layer w0.6: R1.1 7.206,9.95 7.631,9.525 D1.2 10.166,10.64 U1.7
NetD2_1: D2.1 D5.2 Q3.1 R2.2 R4.2 | length 24.3
  Top Layer w0.5: v1(6.881,5.675) 17.181,5.675 21.131,9.625 ; R4.2 19.856,10.9 21.131,9.625 ; D2.1 22.531,13.145 R2.2 22.531,9.725 D5.2 21.131,9.625
  Bottom Layer w0.5: v1(6.881,5.675) 6.928,5.722 Q3.1
NetD2_2: D2.2 R2.1 U1.4 | length 5.7
  Top Layer w0.6: U1.4 19.016,13.18 D2.2 20.131,13.3 20.981,12.45 R2.1
NetD6_1: D6.1 D9.2 Q2.1 R5.1 R7.2 | length 13.6
  Top Layer w0.5: R7.2 40.856,27.2 41.881,26.175 D9.2
  Top Layer w0.6: D6.1 43.251,28.08 R5.1 D9.2@43.406,26.2 ; D9.2 43.431,24.344 43.9,23.875 v1(43.9,23.725)
  Bottom Layer w0.6: Q2.1 42.471,21.09 43.9,22.519 v1(43.9,23.725)
NetD6_2: D6.2 R5.2 U2.7 | length 6.1
  Top Layer w0.6: U2.7 38.896,28.635 D6.2 41.431,29.75 41.856,29.325 R5.2
NetD7_1: D7.1 D10.2 Q4.1 R6.1 R8.2 | length 24.7
  Top Layer w0.4: 27.931,29.65 32.156,33.875 v1(42.181,33.875)
  Top Layer w0.5: D7.1 26.531,26.13 R6.1 26.531,29.55 D10.2 27.931,29.65 29.206,28.375 R8.2
  Bottom Layer w0.4: Q4.1 42.134,33.828 v1(42.181,33.875)
NetD7_2: D7.2 R6.2 U2.4 | length 5.7
  Top Layer w0.6: R6.2 28.081,26.825 28.931,25.975 D7.2 30.046,26.095 U2.4
NetDS2_2: DS2.2 R15.1 | length 2.3
  Top Layer w0.6: DS2.2@33.781,31.925 R15.1
NetDS3_2: DS3.2 R16.1 | length 2.3
  Top Layer w0.6: R16.1 DS3.2@15.281,7.35
NetQ1_2: Q1.2 Q2.2 R9.2 U3.2 | length 15.7
  Top Layer w0.4: v1(24.126,29.701) 24.23,29.805 24.805,29.805 30.11,35.11 35.288,35.11 36.356,36.178 U3.2
pads on no net: CN1.PAD1 CN1.PAD2 R12.0 R13.0 R15.0 R16.0 U1.0 U1.2 U2.0 U2.2 U6.0
copper on no net: | length 44
  Top Layer w0.2: 20.112,0.321 20.62,0.321 20.62,0.702 20.112,0.702 20.112,1.083 20.62,1.083 ; 20.112,2.226 20.112,2.353 20.112,2.988 20.493,2.607 20.874,2.988 20.874,2.226 ; 21.001,0.321 21.001,0.829 21.255,1.083 21.509,0.829 21.509,0.321 ; 21.001,0.575 21.128,0.575 21.509,0.575 ; 21.255,2.226 21.255,2.988 21.89,2.988 21.89,2.226 21.268,2.226 ; 21.89,0.321 21.89,1.083 22.398,0.575 ; 22.271,2.226 22.271,2.988 22.652,2.988 22.779,2.988 22.779,2.734 22.652,2.607 22.525,2.607 22.779,2.353 22.779,2.226 ; 22.398,0.321 22.398,1.083 ; 22.906,0.321 22.906,0.702 ; 22.906,1.083 22.906,0.702 ; 23.16,2.226 23.16,2.988 23.668,2.988 23.668,2.734 23.541,2.607 23.414,2.607 ; 23.414,0.321 23.414,1.083 ; 23.414,0.702 22.906,0.702 ; 23.795,0.321 23.795,0.829 24.049,1.083 24.303,0.829 24.303,0.321 ; 23.922,0.575 24.303,0.575 ; 24.049,2.226 24.049,2.607 24.049,2.988 ; 24.176,2.607 24.557,2.607 ; 24.557,2.226 24.557,2.988 ; 24.925,0.1 24.925,0.321 ; 24.938,2.226 25.446,2.226 ; 24.938,2.607 25.446,2.607 ; 24.938,2.988 25.446,2.988 ; 25.192,0.321 24.684,0.321 24.684,1.083 25.192,1.083 ; 25.573,0.321 25.573,1.083 26.208,1.083 26.208,0.321 25.586,0.321 ; 25.827,2.988 25.827,2.353 25.954,2.226 26.335,2.226 26.462,2.353 26.462,2.988 ; 26.843,2.226 27.351,2.226 27.351,2.607 26.843,2.607 26.843,2.988 27.351,2.988 ; 27.351,1.083 27.859,1.083 27.859,0.702 27.351,0.702 27.351,0.321 27.859,0.321 ; 28.367,2.988 28.367,2.48 28.621,2.226 28.875,2.48 28.875,2.988 ; 29.129,0.321 29.129,1.083 ; 29.383,2.226 29.891,2.226 29.891,2.607 29.383,2.607 29.383,2.988 29.891,2.988 ; 29.51,0.321 30.018,0.829 30.018,1.083 29.891,1.083 29.51,1.083 ; 28.24,0.321 28.748,0.321 28.748,1.083 28.24,1.083 28.24,0.321

## Polygon pours and split planes (outlines as drawn)
NetC7_1 on Bottom Layer "NETC7_1_L02_P024" (solid, pour order 24): 29.225,12.45 29.209,12.434 29.209,7.805 37.53,7.805 43.25,13.525 43.2,13.575 43.2,15.95 36.55,15.95 36.55,12.425
GND on Bottom Layer "GND_L02_P064" (solid, remove dead copper, pour order 64): -0.075,48.675 48.575,48.675 48.6,48.65 48.6,-0.075 -0.1,-0.075
NetC3_1 on Bottom Layer "NETC3_1_L02_P060" (solid, pour order 60): 5.756,23.8 9.481,23.8 12.431,20.85 12.431,14.875 12.956,14.35 12.956,3.9 11.306,3.9 8.756,6.45 8.756,18.725 5.807,21.674
NetC7_1 on Bottom Layer "NETC7_1_L02_P058" (solid, pour order 58): 43.306,15.475 36.631,15.475 36.631,24.4 36.106,24.925 36.106,35.375 36.256,35.375 40.256,31.375 40.256,20.6 43.255,17.601
NetQ1_2 on Bottom Layer "Bottom Layer-No Net" (solid, pour order 54): 12.881,25.925 16.881,29.925 29.856,29.925 36.231,23.55 36.231,15.2 21.856,15.2 21.606,15.45 12.856,15.45
"BAT 5S" on Bottom Layer "BAT_5S_L02_P056" (solid, pour order 56): 26.381,35.525 26.381,30.55 26.356,30.525 15.781,30.525 15.781,35.475 15.806,35.5
NetC3_1 on Bottom Layer "Bottom Layer-No Net" (solid, shelved, pour order 34): 0.374,48.075 9.656,48.075 9.656,22.825 0.374,22.825
"BAT 5S" on Bottom Layer "NONET_L02_P042" (solid, shelved, pour order 42): 22.531,26.5 28.931,26.5 28.931,18.725 22.531,18.725
GND on Bottom Layer "GND" (solid, remove dead copper, shelved, pour order 50): 0,0 51.562,0 51.562,48.6 0,48.6
GND on Bottom Layer "GND" (solid, remove dead copper, shelved, pour order 46): 0.508,1.079 51.054,1.079 51.054,48.6 0.508,48.6
"BAT 5S" on Bottom Layer "BAT 5S" (solid, remove dead copper, shelved, pour order 44): 21.971,26.225 21.971,19.24 23.876,17.335 27.94,17.335 29.845,19.24 29.845,26.225
GND on Top Layer "GND_L01_P062" (solid, remove dead copper, pour order 62): -0.075,48.675 48.575,48.675 48.6,48.65 48.6,-0.075 -0.1,-0.075
GND on Top Layer "GND" (solid, remove dead copper, shelved, pour order 48): 0,48.6 51.562,48.6 51.562,0.571 0,0.571
GND on Top Layer "GND" (solid, remove dead copper, shelved, pour order 52): 0,48.6 51.562,48.6 51.562,0 0,0

## Other copper
Top Layer:
  text "GND" at 7.775,30.9 h1.52 r90
  text "M1" at 34.875,8.6 h1.52

## Silkscreen, mask and mechanical layers (free items; w line width, h text height)
Top Overlay:
  text "VBAT" at 15.256,28.3 h1.52
  text "GND" at 9.256,28.175 h1.52
  text "M1" at 34.67,9.548 h1.52
Mechanical 1:
  lines w0.2: -0.1,0 ccw(c0,0) 0,-0.1 ; -0.1,0 ccw(c0,0) 0,-0.1 ; -0.1,0 -0.1,48.6 ; -0.1,48.6 cw(c0,48.6) 0,48.7 ; -0.1,48.6 cw(c0,48.6) 0,48.7 ; 0,-0.1 48.6,-0.1 48.6,48.7 0,48.7